# Altium PCB PCB.pcbdoc (part 2 of 2)
Units mil, origin at the board's own origin, x right, y up, seen from the top; angles counter-clockwise.
Board outline 3545 x 2665 mil, 4 copper layers (Top Layer, VCC, GND, Bottom Layer), stack 62.447 mil thick; 58 components, 38 nets, 229 pads, 78 vias.
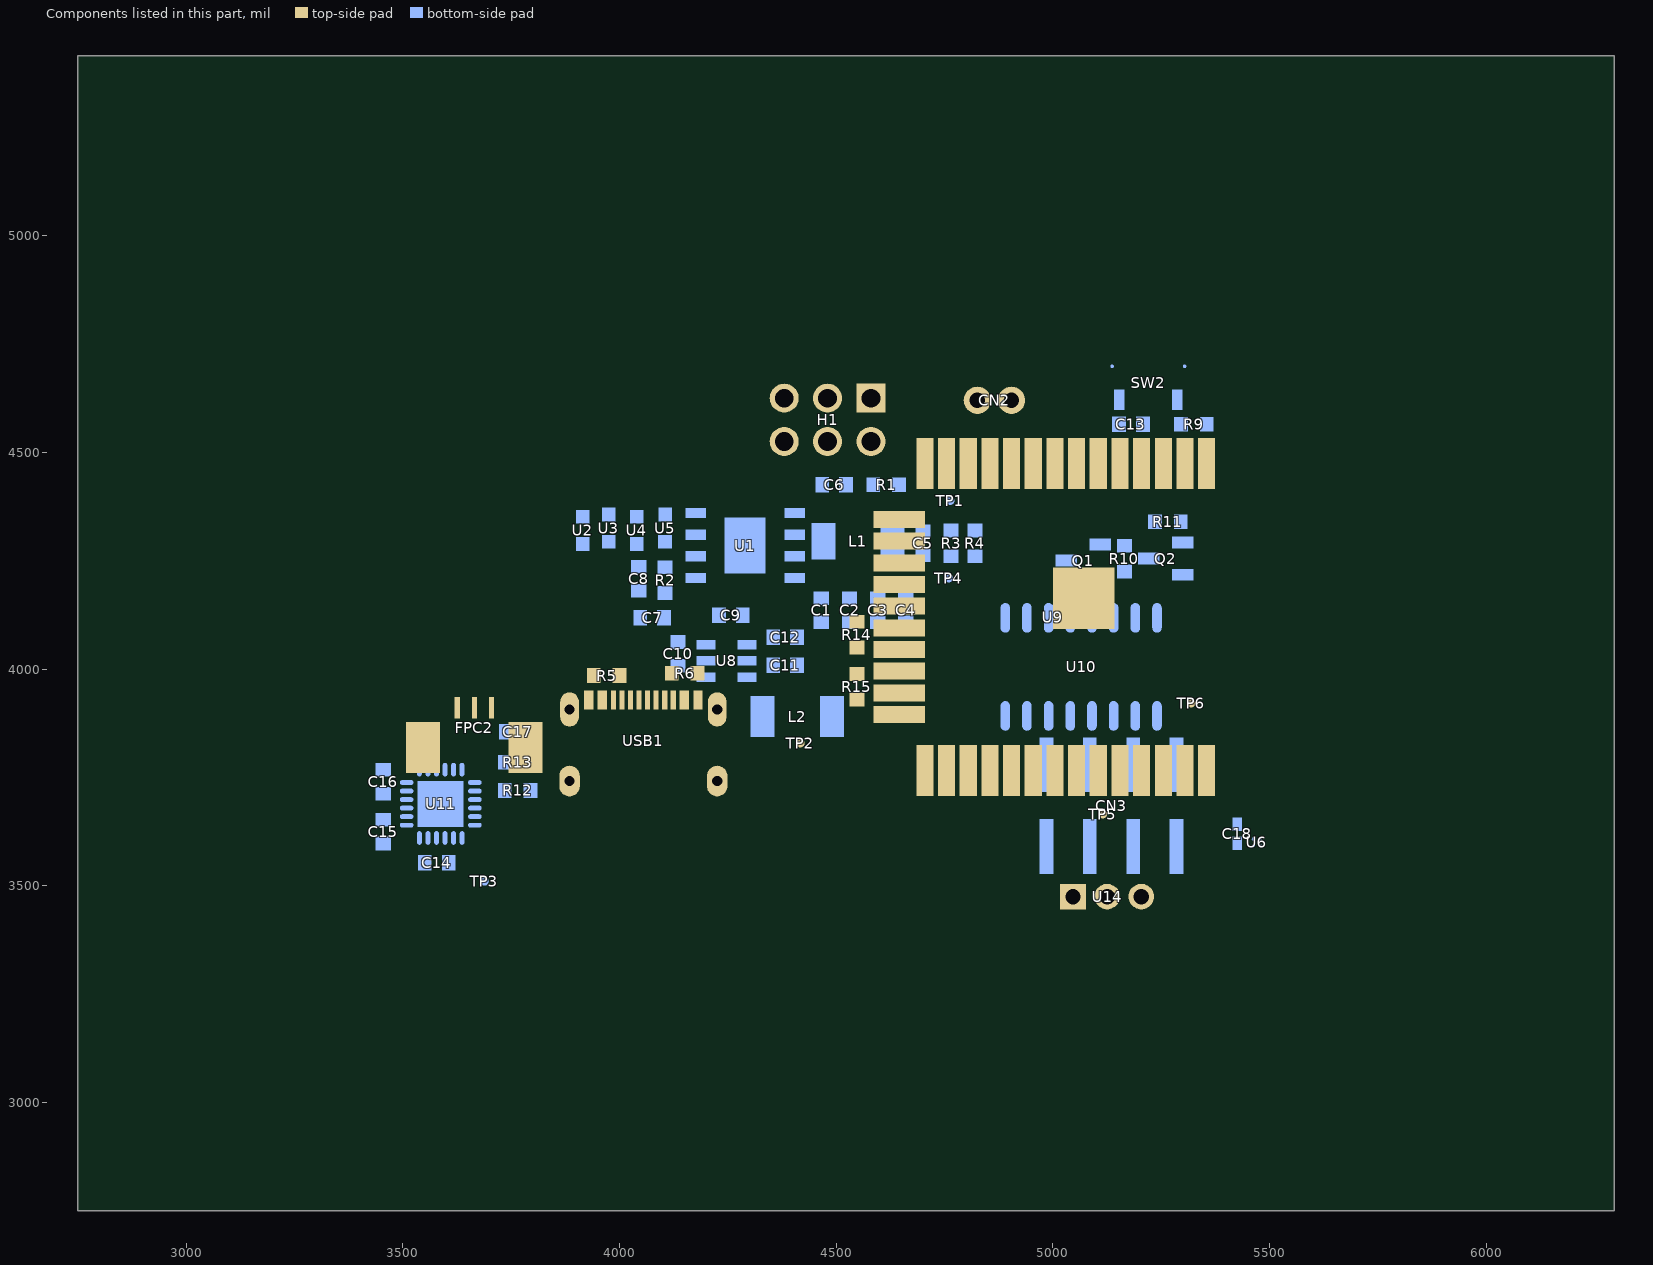
[diagram p4: the components of this part, seen from the top]

## Other copper (continued)
Bottom Layer:
  region net $1N117: 4438.7,4256.46 4434.71,4266.62 ccw(c4412.63,4288.7) 4442.6,4279.94 4442.6,4254.94 ccw(c4440.31,4254.85)
  region net BAT_+: 4629.66,4381.73 4659.66,4381.73 ccw(c5106.34,4336.73) 4657.4,4336.73 4607.16,4336.73 ccw(c4573.41,4381.73)
  region net BAT_+: 4700,4332.56 4700,4302.56 ccw(c4700,4250.98) 4657.4,4280.06 4657.4,4336.73 ccw(c4700,4552.12)
  region net BAT_+: 4762.72,4332.56 4762.72,4302.56 ccw(c4762.72,2948.58) 4717.72,4301.81 4717.72,4333.31 ccw(c4762.72,5686.54)
  region net BAT_+: 4652.4,4302.56 4652.4,4332.56 ccw(c4652.4,4929.87) 4682.28,4333.31 4682.28,4301.81 ccw(c4652.4,3705.25)
  region net $1N115: 4506.61,4401.98 4501.51,4411.02 ccw(c4480.3,4426.93) 4506.81,4426.93 4522.52,4407.28 ccw(c4522.52,4380.77)
  region net $1N115: 4553.31,4430 4553.31,4420 ccw(c4553.31,4401.25) 4538.31,4412.5 4538.31,4437.5 ccw(c4553.31,4448.75)
  region net $1N108: 4100,4151.37 4110,4151.37 ccw(c4128.75,4151.37) 4117.5,4136.37 4092.5,4136.37 ccw(c4081.25,4151.37)
  region net +5V: 4103.87,4250.79 4103.87,4220.79 ccw(c4103.87,3064.94) 4062.29,4220.04 4062.29,4251.54 ccw(c4103.87,5406.64)
  region net VCC_5V: 4320.03,4140 4320.03,4110 ccw(c4320.03,4058.9) 4300.28,4106.03 4300.28,4141.46 ccw(c4320.03,4274.18)
  region net GND: 4234.41,4092.65 4224.41,4092.65 ccw(c4208.73,4092.65) 4216.91,4106.03 4241.91,4106.03 ccw(c4250.1,4092.65)
  region net $1N76: 4167.72,4066.3 4167.72,4056.3 ccw(c4167.72,4037.55) 4152.72,4048.8 4152.72,4073.8 ccw(c4167.72,4085.05)
  region net $1N75: 4161.18,4011.18 4161.18,4001.18 ccw(c4161.18,3992.65) 4152.72,3993.68 4152.72,4018.68 ccw(c4161.18,4019.71)
  region net VDD_3V3: 4339.41,4071.46 4369.41,4071.46 ccw(c5723.39,4071.46) 4370.16,4026.46 4338.67,4026.46 ccw(c2985.44,4071.46)
  region net VDD_3V3: 4372.93,4022.07 4372.93,4012.07 ccw(c4381.71,4004.57) 4370.16,4004.57 4370.16,4026.46 ccw(c4375.03,4026.46)
  region net VDD_3V3: 4369.41,4011.03 4339.41,4011.03 ccw(c2985.44,4011.03) 4338.67,4056.03 4370.16,4056.03 ccw(c5723.39,4011.03)
  region net EN: 5157.44,4532.28 5147.44,4532.28 ccw(c5128.69,4532.28) 5139.94,4547.28 5164.94,4547.28 ccw(c5176.19,4532.28)
  region net EN: 5147.44,4597.72 5157.44,4597.72 ccw(c5176.19,4597.72) 5164.94,4582.72 5139.94,4582.72 ccw(c5128.69,4597.72)
  region net VDD_3V3: 3620.8,3490.8 3590.8,3490.8 ccw(c2253.42,3490.8) 3590.05,3535.52 3621.54,3535.52 ccw(c4958.17,3490.8)
  region net GND: 3566.62,3576.26 3571.73,3567.22 ccw(c3592.94,3551.31) 3566.42,3551.31 3550.71,3570.95 ccw(c3550.71,3597.47)
  region net VDD_3V3: 3478.02,3636.61 3468.98,3631.51 ccw(c3453.07,3610.3) 3453.07,3636.81 3472.72,3652.52 ccw(c3499.23,3652.52)
  region net VDD_3V3: 3487.72,3664.5 3487.72,3654.5 ccw(c3487.72,3635.75) 3472.72,3647 3472.72,3668.31 ccw(c3487.72,3695.95)
  region net $1N30: 3478.91,3713.16 3482.59,3695.34 ccw(c3476.76,3689.5) 3472.72,3696.69 3472.72,3728.19 ccw(c3494.04,3728.19)
  region net $1N29: 3724.05,3831.98 3716.39,3838.46 ccw(c3695.18,3854.37) 3721.69,3854.37 3739.96,3837.28 ccw(c3739.96,3810.77)
  region net $1N75: 4287.6,3872.93 4287.6,3882.93 ccw(c4287.6,3901.68) 4302.6,3890.43 4302.6,3865.43 ccw(c4287.6,3854.18)
  region net VDD_3V3: 4450,3885 4450,3895 ccw(c4450,3908.8) 4462.28,3902.5 4462.28,3877.5 ccw(c4450,3871.2)
  region net VDD_3V3: 4485,3952.24 4495,3952.24 ccw(c4513.75,3952.24) 4502.5,3937.24 4477.5,3937.24 ccw(c4466.25,3952.24)
  region net $1N52: 5148.98,4297.4 5148.98,4287.4 ccw(c5148.98,4268.65) 5133.98,4279.9 5133.98,4301.18 ccw(c5148.98,4329.06)
  region net DTR: 5115,4190 5105,4190 ccw(c5096.06,4190) 5097.5,4198.82 5122.5,4198.82 ccw(c5123.94,4190)
  region net DTR: 5082.07,4202.93 5082.07,4212.93 ccw(c5072.97,4220.43) 5084.76,4220.43 5084.76,4198.82 ccw(c5080.28,4198.82)
  region net IO0: 4991.02,4245 4991.02,4255 ccw(c4991.02,4273.75) 5006.02,4262.5 5006.02,4237.5 ccw(c4991.02,4226.25)
  region net $1N50: 5294.37,4321.18 5304.37,4321.18 ccw(c5323.12,4321.18) 5311.87,4306.18 5286.87,4306.18 ccw(c5275.62,4321.18)
  region net EN: 5337.6,4222.6 5337.6,4212.6 ccw(c5337.6,4196.48) 5323.98,4205.1 5323.98,4230.1 ccw(c5337.6,4238.72)
  region net RTS: 5225.63,4240.63 5215.63,4240.63 ccw(c5208.13,4193.3) 5208.13,4241.22 5233.13,4241.22 ccw(c5233.13,4193.3)
  region net BAT_+: 4629.66,4459.66 4659.66,4459.66 ccw(c4838.05,4459.66) 4660.54,4442.01 4628.78,4442.01 ccw(c4451.27,4459.66)
  region net BAT_+: 4659.66,4362.99 4629.66,4362.99 ccw(c3472.76,4362.99) 4628.78,4407.99 4660.54,4407.99 ccw(c5816.56,4362.99)
  region net $1N115: 4554.46,4420 4554.46,4430 ccw(c4554.46,4448.75) 4569.46,4437.5 4569.46,4412.5 ccw(c4554.46,4401.25)
  region net +5V: 4138.07,4222.81 4116.85,4201.59 ccw(c4068.5,4153.24) 4087.99,4218.78 4122.01,4250.54 ccw(c4182.06,4266.8)
  region net +5V: 4044.57,4220.79 4044.57,4250.79 ccw(c4087.99,7925.08) 4087.99,4250.54 4087.99,4218.78 ccw(c4044.58,3750.29)
  region net $1N108: 4110,4144.46 4100,4144.46 ccw(c4081.25,4144.46) 4092.5,4159.46 4117.5,4159.46 ccw(c4128.75,4144.46)
  region net BAT_+: 4702.99,4302.56 4702.99,4332.56 ccw(c4702.99,4674.33) 4747.99,4335.54 4747.99,4303.78 ccw(c4747.99,3476.31)
  region net BAT_ADC: 4797.01,4265.34 4797.01,4255.34 ccw(c4797.01,4236.59) 4782.01,4247.84 4782.01,4272.84 ccw(c4797.01,4284.09)
  region net BAT_ADC: 4787.99,4255.34 4787.99,4265.34 ccw(c4787.99,4284.09) 4802.99,4272.84 4802.99,4247.84 ccw(c4787.99,4236.59)
  region net BAT_ADC: 4852.01,4265.34 4852.01,4255.34 ccw(c4852.01,4236.59) 4837.01,4247.84 4837.01,4272.84 ccw(c4852.01,4284.09)
  region net GND: 4815,4350.54 4825,4350.54 ccw(c4843.75,4350.54) 4832.5,4335.54 4807.5,4335.54 ccw(c4796.25,4350.54)
  region net VDD_3V3: 5309.7,4589.96 5319.17,4578.22 ccw(c5350.99,4554.36) 5311.22,4554.36 5285.83,4582.01 ccw(c5285.83,4621.78)
  region net EN: 5375.84,4550.89 5369.9,4542.69 ccw(c5353.99,4521.48) 5353.99,4547.99 5370.54,4566.8 ccw(c5397.05,4566.8)
  region net $1N52: 5132.99,4287.4 5132.99,4297.4 ccw(c5132.99,4334.85) 5147.99,4300.54 5147.99,4279.9 ccw(c5132.99,4268.65)
  region net RTS: 5170,4200 5160,4200 ccw(c5150.28,4200) 5152.5,4209.46 5177.5,4209.46 ccw(c5179.72,4200)
  region net RTS: 5197.01,4230 5197.01,4220 ccw(c5197.01,4201.25) 5182.01,4212.5 5182.01,4237.5 ccw(c5197.01,4248.75)
  region net $1N50: 5304.37,4307.99 5294.37,4307.99 ccw(c5275.62,4307.99) 5286.87,4322.99 5310.54,4322.99 ccw(c5325.7,4307.99)
  region net DTR: 5204.46,4335 5204.46,4345 ccw(c5204.46,4363.75) 5219.46,4352.5 5219.46,4327.5 ccw(c5204.46,4316.25)
  region net VDD_3V3: 3779.66,3775 3809.66,3775 ccw(c4634.43,3775) 3810.54,3737.01 3778.78,3737.01 ccw(c2954.89,3775)
  region net VDD_3V3: 3783.91,3658.39 3756.1,3673.48 ccw(c3450.88,3818.29) 3778.78,3737.01 3810.54,3702.99 ccw(c3843.23,3653.22)
  region net SDA: 3740.34,3687.99 3730.34,3687.99 ccw(c3711.59,3687.99) 3722.84,3702.99 3747.84,3702.99 ccw(c3759.09,3687.99)
  region net VDD_3V3: 3809.66,3725 3779.66,3725 ccw(c2723.62,3725) 3778.78,3767.99 3810.54,3767.99 ccw(c4865.7,3725)
  region net SCL: 3727.51,3760.1 3709.76,3756.49 ccw(c3646.68,3819.56) 3719.46,3767.99 3740.83,3767.99 ccw(c3749.59,3738.02)
  region net SCL: 3750.24,3807.31 3756.52,3799.45 ccw(c3777.73,3783.54) 3751.22,3783.54 3734.33,3802.01 ccw(c3734.33,3828.52)
  region net EN: 5157.44,4582.99 5147.44,4582.99 ccw(c5126.15,4582.99) 5141.26,4597.99 5164.88,4597.99 ccw(c5176.28,4582.99)
  region net $1N106: 4205,4265 4205,4255 ccw(c4206.01,4248.19) 4199.12,4248.19 4199.12,4271.81 ccw(c4206.01,4271.81)
  region net $1N105: 4136.88,4351.48 4136.88,4361.48 ccw(c4136.88,4380.23) 4151.88,4368.98 4151.88,4348.19 ccw(c4136.88,4315.6)
  region net $1N115: 4365.88,4305 4365.88,4315 ccw(c4365.88,4334.92) 4380.88,4321.81 4380.88,4298.19 ccw(c4365.88,4285.08)
  region net $1N117: 4435.16,4265 4435.16,4255 ccw(c4435.16,4247.96) 4428.12,4248.19 4428.12,4271.81 ccw(c4435.16,4272.04)
  region net $1N105: 3945.88,4356.48 3945.88,4346.48 ccw(c3945.88,4327.73) 3930.88,4338.98 3930.88,4363.98 ccw(c3945.88,4375.23)
  region net $1N106: 3945.61,4293.52 3945.61,4283.52 ccw(c3945.61,4264.77) 3930.61,4276.02 3930.61,4301.02 ccw(c3945.61,4312.27)
  region net $1N106: 3944.12,4283.52 3944.12,4293.52 ccw(c3944.12,4312.27) 3959.12,4301.02 3959.12,4277.78 ccw(c3944.12,4261.08)
  region net $1N106: 3980,4262.78 3970,4262.78 ccw(c3951.25,4262.78) 3962.5,4277.78 3987.5,4277.78 ccw(c3998.75,4262.78)
  region net $1N105: 3944.39,4346.48 3944.39,4356.48 ccw(c3944.39,4375.23) 3959.39,4363.98 3959.39,4340.73 ccw(c3944.39,4324.03)
  region net $1N105: 4005.89,4361.48 4005.89,4351.48 ccw(c4005.89,4332.73) 3990.89,4343.98 3990.89,4368.98 ccw(c4005.89,4380.23)
  region net $1N105: 4070.88,4356.48 4070.88,4346.48 ccw(c4070.88,4327.73) 4055.88,4338.98 4055.88,4363.98 ccw(c4070.88,4375.23)
  region net $1N105: 4009.39,4351.48 4009.39,4361.48 ccw(c4009.39,4383.92) 4024.39,4367.22 4024.39,4343.98 ccw(c4009.39,4332.73)
  region net $1N104: 4070.61,4293.52 4070.61,4283.52 ccw(c4070.61,4264.77) 4055.61,4276.02 4055.61,4301.02 ccw(c4070.61,4312.27)
  region net $1N104: 4074.12,4283.52 4074.12,4293.52 ccw(c4074.12,4312.27) 4089.12,4301.02 4089.12,4277.78 ccw(c4074.12,4261.08)
  region net $1N104: 4135.61,4298.52 4135.61,4288.52 ccw(c4135.61,4269.77) 4120.61,4281.02 4120.61,4306.02 ccw(c4135.61,4317.27)
  region net $1N105: 4074.39,4346.48 4074.39,4356.48 ccw(c4074.39,4375.23) 4089.39,4363.98 4089.39,4340.73 ccw(c4074.39,4324.03)
  region net $1N105: 4135.89,4361.48 4135.89,4351.48 ccw(c4135.89,4332.73) 4120.89,4343.98 4120.89,4368.98 ccw(c4135.89,4380.23)
  region net $1N76: 4163.08,4056.3 4163.08,4066.3 ccw(c4163.08,4234.55) 4178.08,4066.97 4178.08,4048.8 ccw(c4163.08,4037.55)
  region net $1N75: 4173.74,4013.74 4173.74,4023.74 ccw(c4172,4029.57) 4178.08,4029.57 4178.08,4007.92 ccw(c4172,4007.92)
  region net $1N75: 4236.26,4023.74 4236.26,4013.74 ccw(c4236.26,3991.87) 4221.39,4007.92 4221.39,4029.57 ccw(c4236.26,4045.62)
  region net VCC_5V: 4327.94,3968.83 4306.73,3947.62 ccw(c4231.67,3872.56) 4272.56,3970.52 4315.87,3992.17 ccw(c4358.57,3999.47)
  region net VCC_5V: 4279.22,4018.74 4309.22,4018.74 ccw(c4365.61,4018.74) 4315.87,3992.17 4272.56,3992.17 ccw(c4222.82,4018.74)
  region net VCC_5V: 4309.22,3981.34 4279.22,3981.34 ccw(c4222.82,3981.34) 4272.56,4007.92 4315.87,4007.92 ccw(c4365.61,3981.34)
  region net BAT_+: 4884.66,4579.07 4863.44,4600.29 4865.63,4602.81 4867.52,4605.64 4869.11,4608.64 4870.42,4611.7 4871.45,4614.68 4872.2,4617.47 4872.7,4619.94 4872.94,4621.97 4906.34,4588.57 4904.31,4588.33 4901.84,4587.83 4899.05,4587.08 4896.07,4586.05 4893.01,4584.74 4890.01,4583.15 4887.18,4581.26
  region net $1N106: 4074.61,4407.07 4077.08,4397.07 4076.14,4396.97 4075.07,4396.69 4072.74,4395.67 4070.48,4394.24 4068.67,4392.59 4066.21,4410.44 4068.36,4409.2 4070.74,4408.12 4072.95,4407.36
  region net $1N106: 3970,4261.35 3980,4261.35 3980.34,4259.54 3981.25,4257.27 3982.53,4254.94 3984.01,4252.94 3965.99,4252.94 3967.47,4254.94 3968.75,4257.27 3969.66,4259.54
  region net BAT_ADC: 5088.65,4385 5088.65,4395 5090.46,4395.34 5092.73,4396.25 5095.06,4397.53 5097.06,4399.01 5097.06,4380.99 5095.06,4382.47 5092.73,4383.75 5090.46,4384.66
  region net EN: 5243.65,4385 5243.65,4395 5245.46,4395.34 5247.73,4396.25 5250.06,4397.53 5252.06,4399.01 5252.06,4380.99 5250.06,4382.47 5247.73,4383.75 5245.46,4384.66
  region net EN: 5276.35,4395 5276.35,4385 5274.54,4384.66 5272.27,4383.75 5269.94,4382.47 5267.94,4380.99 5267.94,4399.01 5269.94,4397.53 5272.27,4396.25 5274.54,4395.34
  region net LED_DI: 4555,3811.35 4565,3811.35 4565.34,3809.54 4566.25,3807.27 4567.53,3804.94 4569.01,3802.94 4550.99,3802.94 4552.47,3804.94 4553.75,3807.27 4554.66,3809.54
  region net LED_DI: 4565,3863.65 4555,3863.65 4554.66,3865.46 4553.75,3867.73 4552.47,3870.06 4550.99,3872.06 4569.01,3872.06 4567.53,3870.06 4566.25,3867.73 4565.34,3865.46
  region net SERVO2: 4980,4303.65 4970,4303.65 4969.66,4305.46 4968.75,4307.73 4967.47,4310.06 4965.99,4312.06 4984.01,4312.06 4982.53,4310.06 4981.25,4307.73 4980.34,4305.46
  region net SERVO2: 4970,4286.35 4980,4286.35 4980.34,4284.54 4981.25,4282.27 4982.53,4279.94 4984.01,4277.94 4965.99,4277.94 4967.47,4279.94 4968.75,4282.27 4969.66,4284.54
  region net IO0: 4640,3786.35 4650,3786.35 4650.34,3784.54 4651.25,3782.27 4652.53,3779.94 4654.01,3777.94 4635.99,3777.94 4637.47,3779.94 4638.75,3782.27 4639.66,3784.54
  region net VDD_3V3: 4495,3943.65 4485,3943.65 4484.66,3945.46 4483.75,3947.73 4482.47,3950.06 4480.99,3952.06 4499.01,3952.06 4497.53,3950.06 4496.25,3947.73 4495.34,3945.46
  region net SCL: 5350,4048.65 5340,4048.65 5339.66,4050.46 5338.75,4052.73 5337.47,4055.06 5335.99,4057.06 5354.01,4057.06 5352.53,4055.06 5351.25,4052.73 5350.34,4050.46
  region net SDA: 4539.73,4049.02 4542.74,4039.02 4541.78,4038.91 4540.69,4038.62 4538.35,4037.59 4536.1,4036.13 4534.34,4034.46 4531.32,4052.22 4533.5,4051.04 4535.89,4050.02 4538.1,4049.29
  region net SDA: 4740,4015 4740,4025 4741.31,4025.34 4743.15,4026.25 4745.17,4027.53 4747.06,4029.01 4747.06,4010.99 4745.17,4012.47 4743.15,4013.75 4741.31,4014.66
  region net GND: 4833.65,4385 4833.65,4395 4835.46,4395.34 4837.73,4396.25 4840.06,4397.53 4842.06,4399.01 4842.06,4380.99 4840.06,4382.47 4837.73,4383.75 4835.46,4384.66
  region net TOUCH1: 5361.35,3480 5361.35,3470 5359.54,3469.66 5357.27,3468.75 5354.94,3467.47 5352.94,3465.99 5352.94,3484.01 5354.94,3482.53 5357.27,3481.25 5359.54,3480.34
  region net TOUCH1: 5521.98,3474.9 5514.9,3481.98 5515.94,3483.5 5516.9,3485.74 5517.64,3488.3 5518.02,3490.75 5530.75,3478.02 5528.3,3477.64 5525.74,3476.9 5523.5,3475.94
  region net SCL: 4121.11,3773.79 4132.39,3776.65 4133.65,3775.65 4135.55,3774.44 4137.73,3773.23 4139.86,3772.23 4123.62,3764.42 4123.81,3765.51 4123.83,3766.73 4123.4,3769.36 4122.45,3771.86 4121.82,3772.92
  region net SDA: 3730.34,3696.69 3740.34,3696.69 3740.68,3694.88 3741.59,3692.61 3742.88,3690.28 3744.35,3688.28 3726.33,3688.28 3727.8,3690.28 3729.09,3692.61 3730,3694.88
  region net SDA: 3727.32,3665.24 3720.24,3672.32 3721.28,3673.84 3722.24,3676.08 3722.98,3678.64 3723.36,3681.09 3736.09,3668.36 3733.64,3667.98 3731.08,3667.24 3728.84,3666.28
  region net SDA: 4030.1,3761.98 4023.02,3754.9 4021.5,3755.94 4019.26,3756.9 4016.7,3757.64 4014.25,3758.02 4026.98,3770.75 4027.36,3768.3 4028.1,3765.74 4029.06,3763.5
  region net SDA: 4280,3751.35 4290,3751.35 4290.34,3749.54 4291.25,3747.27 4292.53,3744.94 4294.01,3742.94 4275.99,3742.94 4277.47,3744.94 4278.75,3747.27 4279.66,3749.54
  region net VDD_3V3: 3546.54,3882.1 3526.54,3885.06 3526.72,3886.32 3527.21,3887.58 3528.6,3889.95 3529.81,3891.98 3530.07,3892.8 3529.93,3893.46 3547.35,3890.5 3547.12,3890.15 3546.94,3889.52 3546.69,3887.57
  region net VDD_3V3: 3524.9,3478.02 3531.98,3485.1 3533.5,3484.06 3535.74,3483.1 3538.3,3482.36 3540.75,3481.98 3528.02,3469.25 3527.64,3471.7 3526.9,3474.26 3525.94,3476.5
  region net EN: 5360,4357.93 cw(c5432.43,4357.93) 5381.21,4409.14 5374.14,4416.21 cw(c5322.93,4467.43) 5322.93,4395 5320,4385 cw(c5320,4355) 5350,4355
  region net VDD_3V3: 5326.86,4585.91 5316.25,4596.52 ccw(c5209.12,4703.64) 5335.34,4619.85 5350.19,4605 ccw(c5433.98,4478.78)
  region net VDD_3V3: 3507.68,3495.25 3514.75,3502.32 ccw(c3574.55,3562.12) 3539.85,3485 3525,3470.15 ccw(c3447.88,3435.45)

## Silkscreen, mask and mechanical layers (free items; w line width, h text height)
Top Silkscreen Layer:
  text "SERVO1" at 4415,4675 h60
  text "GND" at 4310,4515 h60 r90
  text "SERVO2" at 4390,4400 h60
  text "RXD_TP" at 5220,3940 h45
  text "WS2812" at 3650,3935 h45
  text "5V_TP" at 4352,3770 h45
  text "TXD_TP" at 5145,3620 h45
  text "12" at 5025,3540 h45
  text "13" at 5105,3540 h45
  text "16" at 5185,3540 h45
  text "TOUCH" at 5290,3405 h60
Bottom Silkscreen Layer:
  text "RESET" at 5520,4660 h60
  text "GND" at 4840,4480 h60
  text "BAT+" at 5020,4480 h60
  text "BAT+_TP" at 4920,4410 h45
  text "BATA_TP" at 4920,4155 h45
  text "GND" at 4915,3815 h60 r90
  text "3V3_TP" at 3785,3450 h45
Mechanical Layer:
  circle w0.1: c5524.62,4610.25 r39.37
  circle w0.1: c5603.72,3506.03 r39.37
  circle w0.1: c3416.02,3504.75 r39.37
  lines w0.1: 5435,3746.81 ccw(c5446.81,3746.81) 5446.81,3735 5663.19,3735 ccw(c5663.19,3746.81) 5675,3746.81 5675,4488.19 ccw(c5663.19,4488.19) 5663.19,4500 5446.81,4500 ccw(c5446.81,4488.19) 5435,4488.19 5435,3746.81